# EAGLE board CT_schematic (EAGLE 7.6.0)

Size 100 x 80 mm. Coordinates in mm from the lower left corner, seen from the top.
Outline: 0,0 100,0 100,80 0,80 0,0
Copper layers (1*16): Top 0.035mm / dielectric 1.5mm / Bottom 0.035mm
Design rules "default": minimum track width 10mil, minimum drill 24mil, track to track 8mil, track to pad 8mil, pad to pad 8mil, via to via 8mil, smd to smd 8mil, copper to edge 40mil, drill to drill 8mil, minimum pad ring 10mil, minimum via ring 8mil, stop-mask expansion 4mil, vias tented up to drill 0mil, thermal gap 10mil

## Footprints (pad centres in the part's own frame; a part is rotated, then mirrored left to right if it is on the bottom)
C0603 = smd 0.8 x 0.8: 1 -0.762,0; 2 0.762,0
C0402 = smd 0.5 x 0.5: 1 -0.508,0; 2 0.508,0
C0805 = smd 1.2 x 1.3: 1 -1.016,0; 2 1.016,0
C1210 = smd 1.2 x 2.5: 1 -1.524,0; 2 1.524,0
C1206 = smd 1.3 x 1.6: 1 -1.524,0; 2 1.524,0
R0603 = smd 0.8 x 0.8: 1 -0.762,0; 2 0.762,0
EXV-9H = smd 3.505 x 1.676: 1 -2.857,0; 2 2.857,0
L0603 = smd 0.8 x 0.8: 1 -0.762,0; 2 0.762,0
IND_PM3316 = smd 2.921 x 2.794: 1 -5.144,0; 2 5.144,0
IND25X25CZ = smd 2.489 x 3.429: 1 -2.718,0; 2 2.718,0
PJ-037B_PACKAGE = drill 3.7 square: 1 12,0 | drill 3.2 square: 2 6,0
LQFP64 = smd 0.3 x 1.2: 1 -3.75,-5.75; 2 -3.25,-5.75; 3 -2.75,-5.75; 4 -2.25,-5.75; 5 -1.75,-5.75; 6 -1.25,-5.75; 7 -0.75,-5.75; 8 -0.25,-5.75; 9 0.25,-5.75; 10 0.75,-5.75; 11 1.25,-5.75; 12 1.75,-5.75; 13 2.25,-5.75; 14 2.75,-5.75; 15 3.25,-5.75; 16 3.75,-5.75; 33 3.75,5.75; 34 3.25,5.75; 35 2.75,5.75; 36 2.25,5.75; 37 1.75,5.75; 38 1.25,5.75; 39 0.75,5.75; 40 0.25,5.75; 41 -0.25,5.75; 42 -0.75,5.75; 43 -1.25,5.75; 44 -1.75,5.75; 45 -2.25,5.75; 46 -2.75,5.75; 47 -3.25,5.75; 48 -3.75,5.75 | smd 1.2 x 0.3: 17 5.75,-3.75; 18 5.75,-3.25; 19 5.75,-2.75; 20 5.75,-2.25; 21 5.75,-1.75; 22 5.75,-1.25; 23 5.75,-0.75; 24 5.75,-0.25; 25 5.75,0.25; 26 5.75,0.75; 27 5.75,1.25; 28 5.75,1.75; 29 5.75,2.25; 30 5.75,2.75; 31 5.75,3.25; 32 5.75,3.75; 49 -5.75,3.75; 50 -5.75,3.25; 51 -5.75,2.75; 52 -5.75,2.25; 53 -5.75,1.75; 54 -5.75,1.25; 55 -5.75,0.75; 56 -5.75,0.25; 57 -5.75,-0.25; 58 -5.75,-0.75; 59 -5.75,-1.25; 60 -5.75,-1.75; 61 -5.75,-2.25; 62 -5.75,-2.75; 63 -5.75,-3.25; 64 -5.75,-3.75
SSOP-28 = smd 1.5 x 0.4: 1 -3.625,4.225; 2 -3.625,3.575; 3 -3.625,2.925; 4 -3.625,2.275; 5 -3.625,1.625; 6 -3.625,0.975; 7 -3.625,0.325; 8 -3.625,-0.325; 9 -3.625,-0.975; 10 -3.625,-1.625; 11 -3.625,-2.275; 12 -3.625,-2.925; 13 -3.625,-3.575; 14 -3.625,-4.225; 15 3.625,-4.225; 16 3.625,-3.575; 17 3.625,-2.925; 18 3.625,-2.275; 19 3.625,-1.625; 20 3.625,-0.975; 21 3.625,-0.325; 22 3.625,0.325; 23 3.625,0.975; 24 3.625,1.625; 25 3.625,2.275; 26 3.625,2.925; 27 3.625,3.575; 28 3.625,4.225
FCI_10118193-0001LF = smd 0.4 x 1.35: 1 -1.3,2.675; 2 -0.65,2.675; 3 0,2.675; 4 0.65,2.675; 5 1.3,2.675 | smd 1.6 x 1.4: 6 -3.2,2.45; 7 3.2,2.45 | smd 1.9 x 1.9: 8 -1.2,0; 9 1.2,0 | hole 0.5: -3.3,0; 3.3,0
TDFN-8/6MM = smd 0.3 x 0.75: 1 0,0; 2 0.5,0; 3 1,0; 4 1.5,0; 5 1.5,3; 6 1,3; 7 0.5,3; 8 0,3
QFN-32 = smd 0.6 x 0.3: 1 -2.3,1.75; 2 -2.3,1.25; 3 -2.3,0.75; 4 -2.3,0.25; 5 -2.3,-0.25; 6 -2.3,-0.75; 7 -2.3,-1.25; 8 -2.3,-1.75; 17 2.3,-1.75; 18 2.3,-1.25; 19 2.3,-0.75; 20 2.3,-0.25; 21 2.3,0.25; 22 2.3,0.75; 23 2.3,1.25; 24 2.3,1.75 | smd 0.3 x 0.6: 9 -1.75,-2.3; 10 -1.25,-2.3; 11 -0.75,-2.3; 12 -0.25,-2.3; 13 0.25,-2.3; 14 0.75,-2.3; 15 1.25,-2.3; 16 1.75,-2.3; 25 1.75,2.3; 26 1.25,2.3; 27 0.75,2.3; 28 0.25,2.3; 29 -0.25,2.3; 30 -0.75,2.3; 31 -1.25,2.3; 32 -1.75,2.3 | smd 3.2 x 3.2: EXP 0,0
SJ-43515TS-SMT-TR = smd 2.2 x 3: 1 0.6,-7.4; 4 3.4,-7.4 | smd 3 x 3: 2 12.8,-7.4; 5 17,-3 | smd 2 x 3: 3 5.3,0; 6 2.5,0 | drill 1.8: P$7 4.5,-3.69; P$8 11.54,-3.69
WM-64PC = drill 0.6 pad 1: 1 -1,0.95; 2 -1,-0.95
QFN65P400X400X100-17N = smd 1.016 x 0.356: 1 -1.803,0.965; 2 -1.803,0.33; 3 -1.803,-0.33; 4 -1.803,-0.965; 9 1.803,-0.965; 10 1.803,-0.33; 11 1.803,0.33; 12 1.803,0.965 | smd 0.356 x 1.016: 5 -0.965,-1.803; 6 -0.33,-1.803; 7 0.33,-1.803; 8 0.965,-1.803; 13 0.965,1.803; 14 0.33,1.803; 15 -0.33,1.803; 16 -0.965,1.803 | smd 2.108 x 2.108: 17 0,0
HTSS-105-01-G-D = drill 1 pad 1.8 square: 1 0,0 | drill 1 pad 1.8: 2 0,2.54; 3 2.54,0; 4 2.54,2.54; 5 5.08,0; 6 5.08,2.54; 7 7.62,0; 8 7.62,2.54; 9 10.16,0; 10 10.16,2.54
ABLS-25.000MHZ-B2F-T = smd 5.6 x 2.8: 1 -3.81,0; 2 5.69,0
ABLS-12.000MHZ-B4-T = smd 5.6 x 2.8: 1 0,0; 2 9.5,0
ASEK = smd 1.4 x 1: 1 -1.1,-0.8; 2 1.1,-0.8; 3 1.1,0.8; 4 -1.1,0.8
ASFL1 = smd 1.7 x 1.5: 1 -1.27,-1.1; 2 1.27,-1.1; 3 1.27,1.1; 4 -1.27,1.1
HTSSOP14 = smd 1.676 x 0.356: 1 -2.8,1.95; 2 -2.8,1.3; 3 -2.8,0.65; 4 -2.8,0; 5 -2.8,-0.65; 6 -2.8,-1.3; 7 -2.8,-1.95; 8 2.8,-1.95; 9 2.8,-1.3; 10 2.8,-0.65; 11 2.8,0; 12 2.8,0.65; 13 2.8,1.3; 14 2.8,1.95 | smd 3 x 5: 15 0,0 | drill 0.4 pad 0.45: P$1 -0.75,1.5; P$2 0.75,1.5; P$3 -0.75,0; P$4 0.8,0; P$5 -0.75,-1.5; P$6 0.9,-1.5
IR3899MTR1PBF = smd 0.25 x 0.75: 1 0,0; 2 0.5,0; 3 1,0; 4 1.5,0; 5 2,0; 6 2.5,0; 7 3,0 | smd 0.75 x 0.25: 8 3.425,0.78; 9 3.425,1.28; 10 3.425,1.78; 14 -0.425,1.78; 15 -0.425,1.28; 16 -0.425,0.78 | smd 0.3 x 1.95: 11 3.22,3.63 | smd 1.62 x 2.42: 12 1.786,3.8 | smd 1 x 1.95: 13 0.117,3.63 | smd 2.19 x 1.25: 17 1.51,1.26
SON-6 = smd 0.55 x 0.3: 1 -0.355,0.5 | smd 0.52 x 0.3: 2 -0.37,0; 3 -0.37,-0.5; 4 0.37,-0.5; 5 0.37,0; 6 0.37,0.5
SW_4-1437565-2 = smd 1.4 x 2.1: 1 -2.23,4.55; 2 -2.23,-4.55; 3 2.23,4.55; 4 2.23,-4.55
LGM67K-G1J2-24-Z = smd 0.8 x 1.4: A -2,0; C 0,0
NC7SZ125M5X = smd 1.3 x 0.7: 1 -1.3,0.95; 2 -1.3,0; 3 -1.3,-0.95; 4 1.3,-0.95; 5 1.3,0.95
DUMMY_PACKAGE_213 = drill 0.3: 1 0,-1; 2 1.5,-1; 3 3,-1

## Placement (x,y rotation side)
C1  1e-06  [C0603]  -76.2,77.47 0 top  (outside the outline)
C2  1e-07  [C0603]  -80.01,77.47 0 top  (outside the outline)
C3  1e-07  [C0603]  -83.82,77.47 0 top  (outside the outline)
C4  1e-07  [C0603]  -87.63,77.47 0 top  (outside the outline)
C5  1e-07  [C0603]  -15.24,82.55 0 top  (outside the outline)
C6  4.7e-06  [C0603]  -64.77,77.47 0 top  (outside the outline)
C7  1e-07  [C0603]  -19.05,82.55 0 top  (outside the outline)
C8  1e-07  [C0603]  -22.86,82.55 0 top  (outside the outline)
C9  1e-08  [C0603]  -26.67,82.55 0 top  (outside the outline)
C10  1e-06  [C0603]  -30.48,82.55 0 top  (outside the outline)
C11  1e-11  [C0402]  -50.8,87.63 0 top  (outside the outline)
C12  1e-11  [C0402]  -54.61,87.63 0 top  (outside the outline)
C13  1e-07  [C0402]  -58.42,87.63 0 top  (outside the outline)
C14  4.7e-06  [C0805]  -27.94,71.12 0 top  (outside the outline)
C15  1e-07  [C0402]  -62.23,87.63 0 top  (outside the outline)
C16  1e-07  [C0402]  -66.04,87.63 0 top  (outside the outline)
C17  1e-08  [C0402]  -69.85,87.63 0 top  (outside the outline)
C18  1e-06  [C0603]  -34.29,82.55 0 top  (outside the outline)
C19  1e-06  [C0603]  -38.1,82.55 0 top  (outside the outline)
C20  1e-06  [C0603]  -41.91,82.55 0 top  (outside the outline)
C21  1e-06  [C0603]  -45.72,82.55 0 top  (outside the outline)
C22  1e-06  [C0603]  -49.53,82.55 0 top  (outside the outline)
C23  1e-06  [C0603]  -53.34,82.55 0 top  (outside the outline)
C24  1e-06  [C0603]  -57.15,82.55 0 top  (outside the outline)
C25  1e-07  [C0402]  -73.66,87.63 0 top  (outside the outline)
C26  1e-07  [C0402]  -77.47,87.63 0 top  (outside the outline)
C27  1e-07  [C0402]  -81.28,87.63 0 top  (outside the outline)
C28  1e-07  [C0402]  -85.09,87.63 0 top  (outside the outline)
C29  1e-06  [C0603]  -60.96,82.55 0 top  (outside the outline)
C30  1e-07  [C0402]  -88.9,87.63 0 top  (outside the outline)
C31  1e-07  [C0402]  -15.24,92.71 0 top  (outside the outline)
C32  1e-06  [C0603]  -64.77,82.55 0 top  (outside the outline)
C33  1e-08  [C0402]  -19.05,92.71 0 top  (outside the outline)
C34  1e-08  [C0402]  -22.86,92.71 0 top  (outside the outline)
C35  1e-06  [C0603]  -68.58,82.55 0 top  (outside the outline)
C36  3.3e-09  [C0402]  -46.99,87.63 0 top  (outside the outline)
C37  1e-07  [C0402]  -26.67,92.71 0 top  (outside the outline)
C38  2.2e-05  [C1210]  -66.04,64.77 0 top  (outside the outline)
C39  2.2e-05  [C1210]  -72.39,64.77 0 top  (outside the outline)
C40  1e-05  [C1206]  -85.09,63.5 0 top  (outside the outline)
C41  1e-05  [C1206]  -16.51,72.39 0 top  (outside the outline)
C42  0.0001  [C1210]  -78.74,64.77 0 top  (outside the outline)
C43  2.2e-06  [C0603]  -68.58,77.47 0 top  (outside the outline)
C44  1e-07  [C0402]  -30.48,92.71 0 top  (outside the outline)
C45  1e-07  [C0402]  -34.29,92.71 0 top  (outside the outline)
C46  7.8444498006919e-09  [R0603]  -38.1,71.12 0 top  (outside the outline)
C47  2.7e-07  [C0603]  -72.39,77.47 0 top  (outside the outline)
C50  1e-07  [C0402]  -38.1,92.71 0 top  (outside the outline)
C51  0.0001  [EXV-9H]  -40.64,57.15 0 top  (outside the outline)
C52  0.0001  [EXV-9H]  -52.07,57.15 0 top  (outside the outline)
C53  1e-08  [C0402]  -41.91,92.71 0 top  (outside the outline)
F1  240.0  [L0603]  -72.39,82.55 0 top  (outside the outline)
I1  1e-05  [IND_PM3316]  -80.01,35.56 0 top  (outside the outline)
I2  6.8e-07  [IND25X25CZ]  -36.83,64.77 0 top  (outside the outline)
J1  PJ-037B  [PJ-037B_PACKAGE]  -83.82,22.86 0 top  (outside the outline)
R2  1000.0  [R0603]  -76.2,82.55 0 top  (outside the outline)
R4  4700.0  [R0603]  -80.01,82.55 0 top  (outside the outline)
R6  2200.0  [R0603]  -83.82,82.55 0 top  (outside the outline)
R7  2200.0  [R0603]  -87.63,82.55 0 top  (outside the outline)
R8  2200.0  [R0603]  -15.24,87.63 0 top  (outside the outline)
R9  10000.0  [R0603]  -76.2,71.12 0 top  (outside the outline)
R10  10000.0  [R0603]  -81.28,71.12 0 top  (outside the outline)
R11  4700.0  [R0603]  -19.05,87.63 0 top  (outside the outline)
R12  10000.0  [R0603]  -86.36,71.12 0 top  (outside the outline)
R13  10000.0  [R0603]  -15.24,77.47 0 top  (outside the outline)
R14  1270.0  [R0603]  -22.86,87.63 0 top  (outside the outline)
R15  1270.0  [R0603]  -26.67,87.63 0 top  (outside the outline)
R16  10000.0  [R0603]  -20.32,77.47 0 top  (outside the outline)
R17  10000.0  [R0603]  -25.4,77.47 0 top  (outside the outline)
R18  47.0  [R0603]  -30.48,87.63 0 top  (outside the outline)
R19  30000.0  [R0603]  -30.48,77.47 0 top  (outside the outline)
R20  22000.0  [R0603]  -35.56,77.47 0 top  (outside the outline)
R21  0.1  [R0603]  -34.29,87.63 0 top  (outside the outline)
R22  4030.2416170974  [R0603]  -45.72,71.12 0 top  (outside the outline)
R23  719.68600305311  [R0603]  -53.34,71.12 0 top  (outside the outline)
R24  64.984347826087  [R0603]  -60.96,71.12 0 top  (outside the outline)
R25  130.0  [R0603]  -38.1,87.63 0 top  (outside the outline)
R26  39000.0  [R0603]  -40.64,77.47 0 top  (outside the outline)
R27  49900.0  [R0603]  -45.72,77.47 0 top  (outside the outline)
R28  5600.0  [R0603]  -41.91,87.63 0 top  (outside the outline)
R29  10000.0  [R0603]  -50.8,77.47 0 top  (outside the outline)
R30  10000.0  [R0603]  -55.88,77.47 0 top  (outside the outline)
R31  82000.0  [R0603]  -60.96,77.47 0 top  (outside the outline)
R32  300000.0  [R0603]  -66.04,71.12 0 top  (outside the outline)
R33  120000.0  [R0603]  -71.12,71.12 0 top  (outside the outline)
U1  stm32f078rbt7  [LQFP64]  -22.86,36.83 0 top  (outside the outline)
U2  FT232RL-REEL  [SSOP-28]  -48.26,7.62 0 top  (outside the outline)
U3  10118193-0001LF  [FCI_10118193-0001LF]  -85.09,46.99 0 top  (outside the outline)
U4  24AA08T-I/MNY  [TDFN-8/6MM]  -58.42,46.99 0 top  (outside the outline)
U5  SGTL5000XNAA3  [QFN-32]  -22.86,48.26 0 top  (outside the outline)
U6  SJ-43515TS-SMT-TR  [SJ-43515TS-SMT-TR]  -80.01,10.16 0 top  (outside the outline)
U7  SJ-43515TS-SMT-TR  [SJ-43515TS-SMT-TR]  -39.37,25.4 0 top  (outside the outline)
U8  SJ-43515TS-SMT-TR  [SJ-43515TS-SMT-TR]  -67.31,25.4 0 top  (outside the outline)
U9  WM-64PCT  [WM-64PC]  -69.85,35.56 0 top  (outside the outline)
U10  TSC2013QRSARQ1  [QFN65P400X400X100-17N]  -35.56,7.62 0 top  (outside the outline)
U11  HTSS-105-01-G-D  [HTSS-105-01-G-D]  -43.18,46.99 0 top  (outside the outline)
U12  ABLS-25.000MHZ-B2F-T  [ABLS-25.000MHZ-B2F-T]  -71.12,57.15 0 top  (outside the outline)
U13  ABLS-12.000MHZ-B4-T  [ABLS-12.000MHZ-B4-T]  -29.21,64.77 0 top  (outside the outline)
U14  ASEK-2-32.768KHz-ECST  [ASEK]  -31.75,57.15 0 top  (outside the outline)
U15  ASFL-24.57MHZ-NCS  [ASFL1]  -76.2,48.26 0 top  (outside the outline)
U16  tps54225PWP  [HTSSOP14]  -45.72,64.77 0 top  (outside the outline)
U17  IR3899MTR1PBF  [IR3899MTR1PBF]  -60.96,33.02 0 top  (outside the outline)
U18  TPS3895ADRYR  [SON-6]  -50.8,91.44 0 top  (outside the outline)
U19  4-1437565-2  [SW_4-1437565-2]  -44.45,36.83 0 top  (outside the outline)
U20  Q65110A2395  [LGM67K-G1J2-24-Z]  -54.61,64.77 0 top  (outside the outline)
U21  nc7sz125m5x  [NC7SZ125M5X]  -21.59,71.12 0 top  (outside the outline)
U22  Dummy  [DUMMY_PACKAGE_213]  -48.26,92.71 0 top  (outside the outline)

## Library data of the parts
C1-C47 C50-C53 F1 I1 I2 J1 R2 R4 R6-R33 U1-U22 = circuit_tree

## Nets
CLK_CRYSTAL_U1_5: C11.1 U1.5 U12.1
CLK_CRYSTAL_U1_6: C12.1 U1.6 U12.2
CLK_CRYSTAL_U2_27: U2.27 U13.1
CLK_CRYSTAL_U2_28: U2.28 U13.2
CLK_U1_3: U1.3 U14.3
CLK_U5_21: U5.21 U15.3
GND: C1.2 C2.2 C3.2 C4.2 C5.2 C6.2 C7.2 C8.2 C9.2 C10.2 C11.2 C12.2 C13.2 C14.2 C15.2 C16.2 C17.2 C25.2 C26.2 C27.2 C28.2 C29.2 C33.2 C34.2 C35.2 C36.2 C38.2 C39.2 C40.2 C41.2 C43.2 C44.2 C45.2 C50.2 C51.2 C52.2 C53.2 J1.2 R2.2 R9.2 R10.2 R13.2 R15.2 R20.2 R21.1 R21.2 R23.2 R26.2 R28.2 R31.2 R33.2 U1.12 U1.18 U1.31 U1.47 U1.63 U2.7 U2.18 U2.21 U2.25 U2.26 U3.5 U3.6 U3.7 U3.8 U3.9 U4.4 U4.7 U5.1 U5.3 U5.7 U5.EXP U7.1 U8.1 U9.2 U10.17 U11.9 U14.2 U15.2 U16.5 U16.8 U16.9 U16.15 U17.4 U17.11 U17.17 U18.2 U20.C U21.1 U21.3 U22.1
NET_U1_7: R4.1 U1.7 U21.4
NET_U1_13: C9.1 C10.1 F1.1 U1.13
NET_U1_28: R10.1 U1.28
NET_U1_29: R7.1 U1.29 U4.6
NET_U1_30: R8.1 U1.30 U4.5
NET_U1_59: R6.1 U1.59 U10.1
NET_U1_60: R9.1 U1.60
NET_U1_61: U20.A
NET_U1_62: U19.3 U19.4
NET_U2_14: R12.1 U2.14
NET_U2_17: C15.1 U2.17
NET_U2_19: R13.1 U2.19
NET_U3_1: R11.1 U3.1
NET_U3_2: U2.16 U3.2
NET_U3_3: U2.15 U3.3
NET_U3_19: R11.2
NET_U5_10: C28.1 U5.10
NET_U5_29: R14.1 U5.29
NET_U5_31: R15.1 U5.31
NET_U6_1: U5.4 U6.1
NET_U6_2: U5.2 U6.2
NET_U6_5: U5.6 U6.5
NET_U7_2: C19.1 U7.2
NET_U7_5: C18.1 U7.5
NET_U7_11: C19.2
NET_U7_12: C18.2
NET_U8_2: C21.1 C22.1 U8.2
NET_U8_5: C20.1 U8.5
NET_U8_13: C21.2 C22.2
NET_U8_14: C20.2
NET_U9_1: C23.1 C24.1 C29.1 U5.16 U9.1
NET_U9_15: C23.2 C24.2
NET_U10_4: R17.1 U10.4
NET_U10_5: R16.1 U10.5
NET_U10_9: C30.2 C31.2 C32.2 R18.2 U10.9
NET_U10_15: R18.1 U10.8 U10.15
NET_U11_3: U10.12 U11.3
NET_U11_4: U10.14 U11.4
NET_U11_5: U10.11 U11.5
NET_U11_6: U10.13 U11.6
NET_U16_2: R19.2 R20.1 U16.2
NET_U16_3: C35.1 U16.3
NET_U16_4: C36.1 U16.4
NET_U16_10: C37.1 I1.1 U16.10 U16.11
NET_U16_12: C37.2 U16.12
NET_U17_1: C46.1 R22.1 R23.1 R24.1 R25.1 U17.1 U17.8
NET_U17_2: C45.1 U17.2
NET_U17_3: C46.2 C47.1 C47.2 U17.3
NET_U17_5: R26.1 U17.5
NET_U17_10: C43.1 U17.10
NET_U17_12: C42.1 I2.1 U17.12
NET_U17_13: U17.13
NET_U17_14: C42.2 U17.14
NET_U17_15: R27.1 R28.1 U17.15
NET_U17_ATNET_3: I2.2 R22.2
NET_U17_ATNET_4: C47.2 R24.2
NET_U17_ATNET_5: R25.2
NET_U18_1: R30.1 R31.1 U18.1
NET_U18_3: R32.2 R33.1 U18.3
NET_U18_4: R29.1 U18.4 U21.2
NET_U19_1: R2.1 U19.1 U19.2
PROC_I2S1_CK: U1.21 U5.24
PROC_I2S1_SD: U1.23 U5.26
PROC_I2S1_WS: U1.20 U5.23
PROC_TIM1_CH1: U1.41 U22.3
PROC_TIM1_CH2N: U1.26 U22.2
PROC_USART1_CTS: U1.44 U2.3
PROC_USART1_RTS: U1.45 U2.11
PROC_USART1_RX: U1.43 U2.1
PROC_USART1_TX: U1.42 U2.5
VCC_S1_16V1: C40.1 C41.1 C44.1 C51.1 C52.1 J1.1 R27.2 U16.7 U16.13 U16.14 U17.9
VCC_TIER1_1V8: C1.1 C2.1 C3.1 C4.1 C5.1 C6.1 C7.1 C8.1 C16.1 C17.1 C25.1 C26.1 C27.1 C30.1 C33.1 C38.1 C39.1 C50.1 C53.1 F1.2 I1.2 R4.2 R6.2 R7.2 R8.2 R14.2 R16.2 R17.2 R19.1 R29.2 R30.2 R32.1 U1.1 U1.19 U1.32 U1.48 U1.64 U2.4 U4.8 U5.5 U5.20 U5.30 U10.7 U14.4 U16.1 U18.6 U21.5
VCC_TIER1_3V3: C13.1 C14.1 C31.1 C32.1 C34.1 I2.2 R12.2 R22.2 U2.20 U10.10 U15.4

## Tracks (layer width: path | path; a pad name or v marks a point on that pad's centre or on a via)
CLK_CRYSTAL_U1_5  (2 unrouted)
CLK_CRYSTAL_U1_6  (2 unrouted)
CLK_CRYSTAL_U2_27  (1 unrouted)
CLK_CRYSTAL_U2_28  (1 unrouted)
CLK_U1_3  (1 unrouted)
CLK_U5_21  (1 unrouted)
GND  (90 unrouted)
NET_U1_7  (2 unrouted)
NET_U1_13  (3 unrouted)
NET_U1_28  (1 unrouted)
NET_U1_29  (2 unrouted)
NET_U1_30  (2 unrouted)
NET_U1_59  (2 unrouted)
NET_U1_60  (1 unrouted)
NET_U1_62  (1 unrouted)
NET_U2_14  (1 unrouted)
NET_U2_17  (1 unrouted)
NET_U2_19  (1 unrouted)
NET_U3_1  (1 unrouted)
NET_U3_2  (1 unrouted)
NET_U3_3  (1 unrouted)
NET_U5_10  (1 unrouted)
NET_U5_29  (1 unrouted)
NET_U5_31  (1 unrouted)
NET_U6_1  (1 unrouted)
NET_U6_2  (1 unrouted)
NET_U6_5  (1 unrouted)
NET_U7_2  (1 unrouted)
NET_U7_5  (1 unrouted)
NET_U8_2  (2 unrouted)
NET_U8_5  (1 unrouted)
NET_U8_13  (1 unrouted)
NET_U9_1  (4 unrouted)
NET_U9_15  (1 unrouted)
NET_U10_4  (1 unrouted)
NET_U10_5  (1 unrouted)
NET_U10_9  (4 unrouted)
NET_U10_15  (2 unrouted)
NET_U11_3  (1 unrouted)
NET_U11_4  (1 unrouted)
NET_U11_5  (1 unrouted)
NET_U11_6  (1 unrouted)
NET_U16_2  (2 unrouted)
NET_U16_3  (1 unrouted)
NET_U16_4  (1 unrouted)
NET_U16_10  (3 unrouted)
NET_U16_12  (1 unrouted)
NET_U17_1  (6 unrouted)
NET_U17_2  (1 unrouted)
NET_U17_3  (3 unrouted)
NET_U17_5  (1 unrouted)
NET_U17_10  (1 unrouted)
NET_U17_12  (2 unrouted)
NET_U17_14  (1 unrouted)
NET_U17_15  (2 unrouted)
NET_U17_ATNET_3  (1 unrouted)
NET_U17_ATNET_4  (1 unrouted)
NET_U18_1  (2 unrouted)
NET_U18_3  (2 unrouted)
NET_U18_4  (2 unrouted)
NET_U19_1  (2 unrouted)
PROC_I2S1_CK  (1 unrouted)
PROC_I2S1_SD  (1 unrouted)
PROC_I2S1_WS  (1 unrouted)
PROC_TIM1_CH1  (1 unrouted)
PROC_TIM1_CH2N  (1 unrouted)
PROC_USART1_CTS  (1 unrouted)
PROC_USART1_RTS  (1 unrouted)
PROC_USART1_RX  (1 unrouted)
PROC_USART1_TX  (1 unrouted)
VCC_S1_16V1  (10 unrouted)
VCC_TIER1_1V8  (46 unrouted)
VCC_TIER1_3V3  (10 unrouted)